# EAGLE board PIC_backpack (EAGLE 8.2.1)
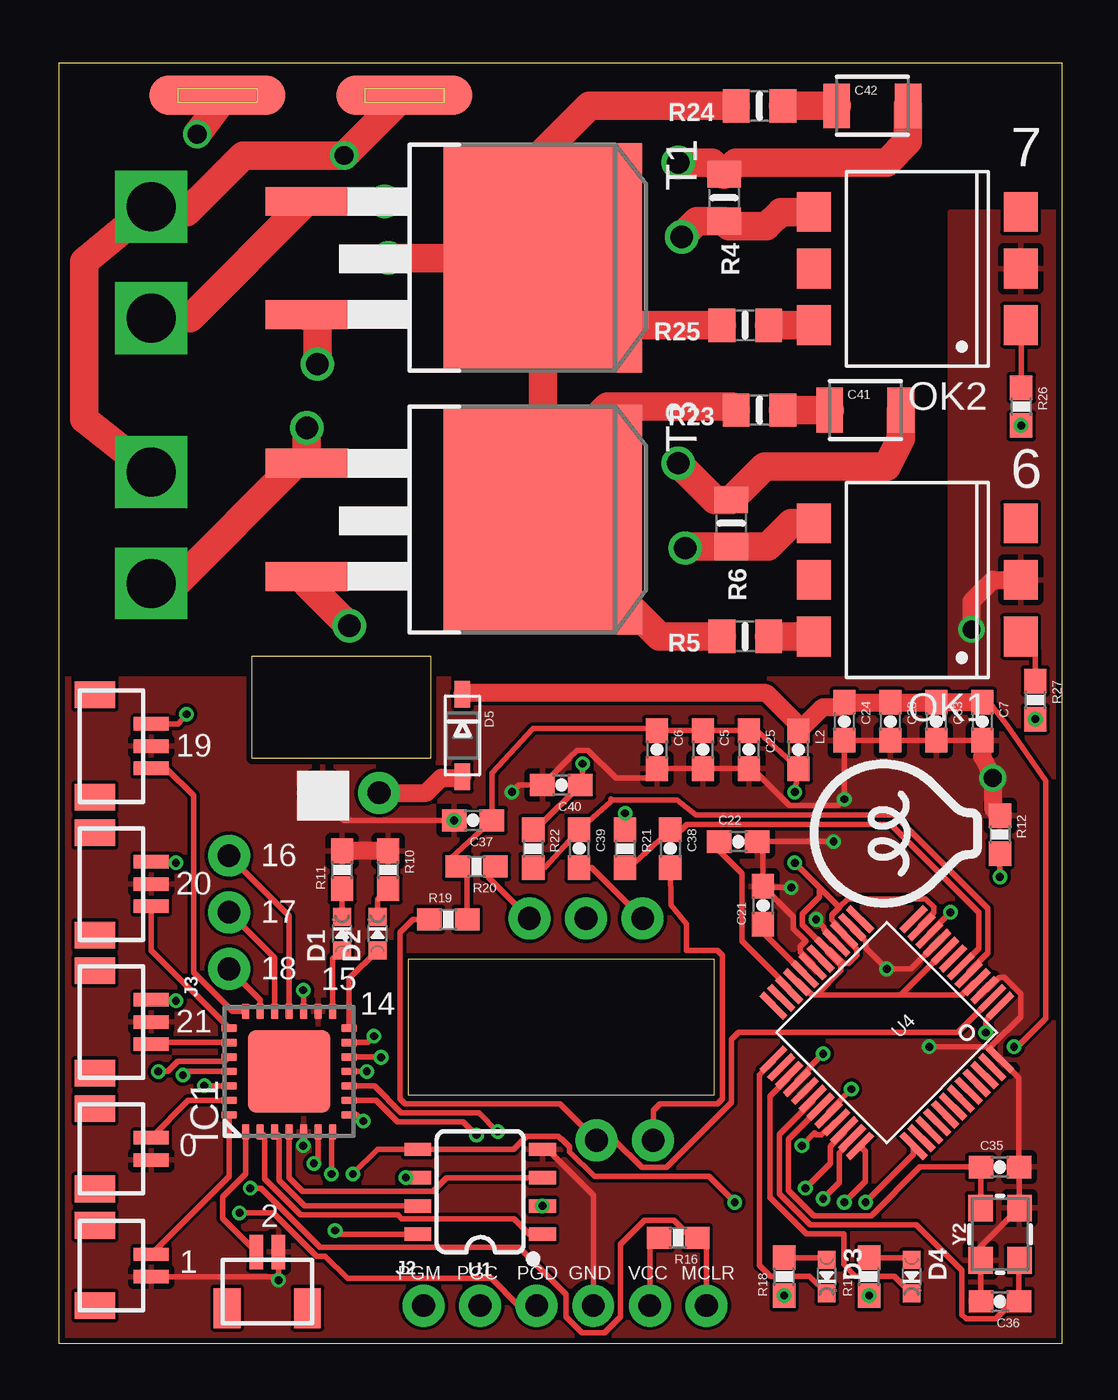
[diagram p0: board, top side]
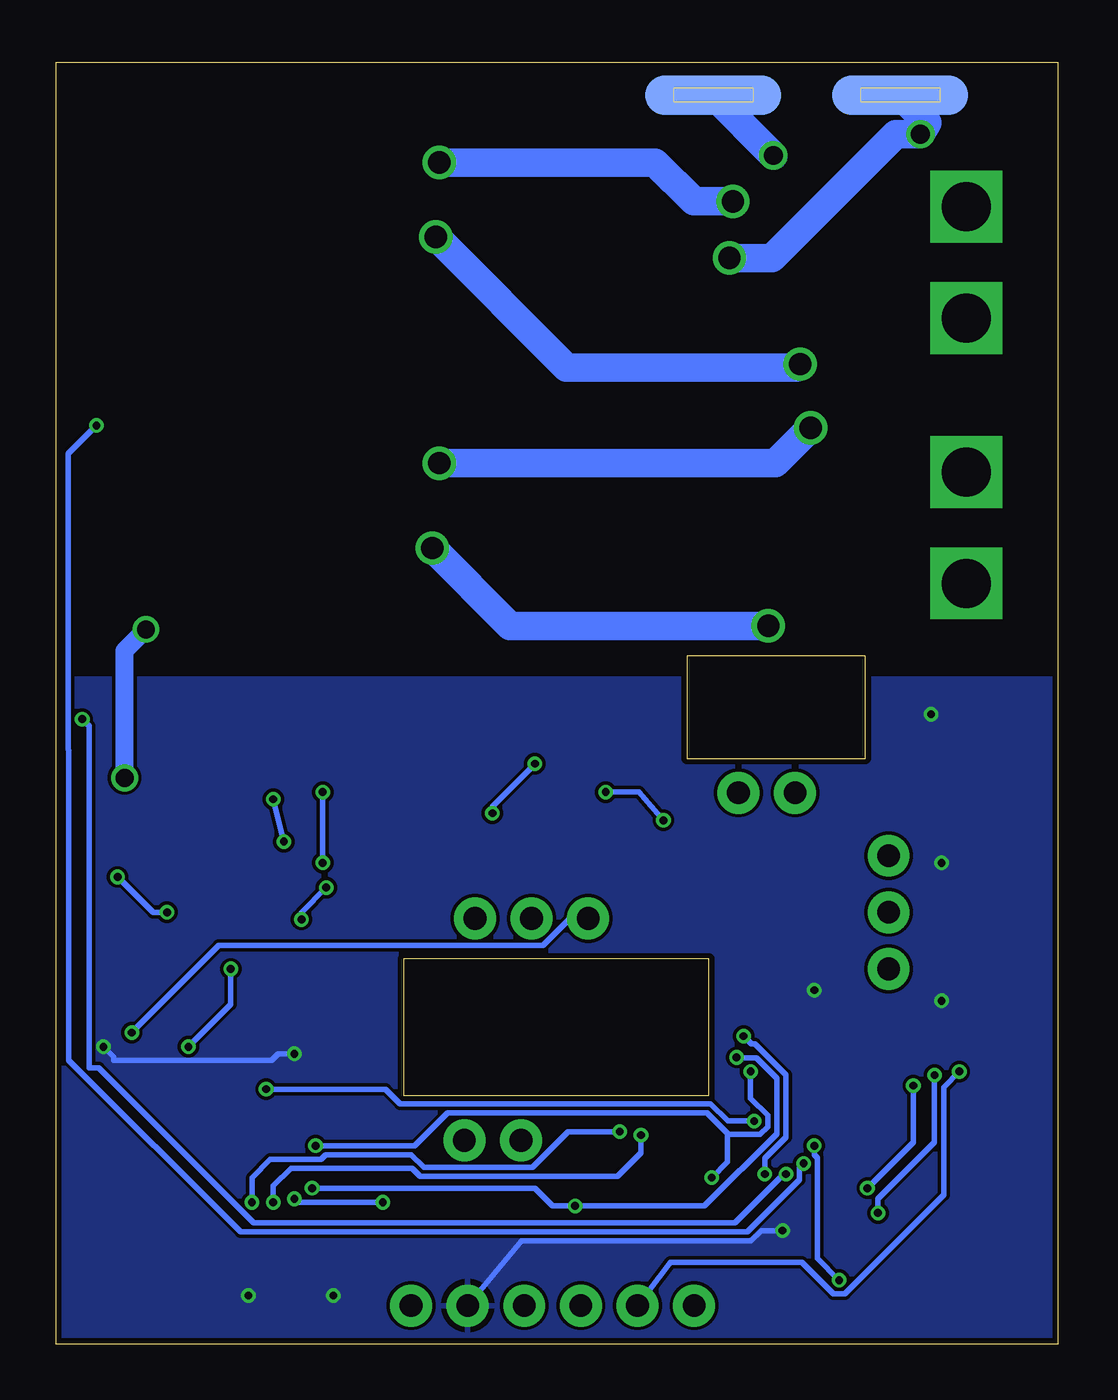
[diagram p1: board, bottom side, seen from below]

Size 45 x 57.5 mm. Coordinates in mm from the lower left corner, seen from the top.
Copper layers (1*16): Top 0.035mm / dielectric 1.5mm / Bottom 0.035mm
Design rules "SeeedStudio_2layer_DRU_no_angle_20140221": minimum track width 6mil, minimum drill 12mil, track to track 6mil, track to pad 6mil, pad to pad 6mil, via to via 6mil, smd to smd 0mil, copper to edge 10mil, drill to drill 10mil, minimum pad ring 10mil, minimum via ring 6mil, stop-mask expansion 2mil, vias tented up to drill 100mil, thermal gap 10mil

## Footprints (pad centres in the part's own frame; a part is rotated, then mirrored left to right if it is on the bottom)
0603-CAP = smd 1.1 x 1: 1 -0.85,0; 2 0.85,0
1210 = smd 1.2 x 2: 1 -1.6,0; 2 1.6,0
CHIPLED_0603_NOOUTLINE = smd 0.8 x 0.8: A 0,-0.75; C 0,0.75
SOD-123 = smd 1.2 x 0.7: A 1.85,0; C -1.85,0
QFN28-ML_6X6MM = smd 0.7 x 0.35: 1 -2.7,1.95; 2 -2.7,1.3; 3 -2.7,0.65; 4 -2.7,0; 5 -2.7,-0.65; 6 -2.7,-1.3; 7 -2.7,-1.95; 15 2.7,-1.95; 16 2.7,-1.3; 17 2.7,-0.65; 18 2.7,0; 19 2.7,0.65; 20 2.7,1.3; 21 2.7,1.95 | smd 0.35 x 0.7: 8 -1.95,-2.7; 9 -1.3,-2.7; 10 -0.65,-2.7; 11 0,-2.7; 12 0.65,-2.7; 13 1.3,-2.7; 14 1.95,-2.7; 22 1.95,2.7; 23 1.3,2.7; 24 0.65,2.7; 25 0,2.7; 26 -0.65,2.7; 27 -1.3,2.7; 28 -1.95,2.7 | smd 3.7 x 3.7: EXP 0,0
1X06_NO_SILK = drill 1.016 pad 1.88: 1 0,0; 2 2.54,0; 3 5.08,0; 4 7.62,0; 5 10.16,0; 6 12.7,0
1X03_NO_SILK = drill 1.016 pad 1.88: 1 0,0; 2 2.54,0; 3 5.08,0
0603 = smd 1.1 x 1: 1 -0.85,0; 2 0.85,0
DIL6-SMD = smd 1.78 x 1.52: 1 -2.54,-4.645; 2 0,-4.645; 3 2.54,-4.645; 4 2.54,4.645; 5 0,4.645; 6 -2.54,4.645
0805_10MGAP = smd 1.2 x 1.5: 1 -1.05,0; 2 1.05,0
0603-RES = smd 1.1 x 1: 1 -0.85,0; 2 0.85,0
D2PAK-3 = smd 1.3 x 3.7: A1 0,0; G 5.08,0 | smd 10.3 x 8.9: A2 2.54,10.6
SO08 = smd 0.6 x 1.2: 1 -1.905,-2.8; 2 -0.635,-2.8; 3 0.635,-2.8; 4 1.905,-2.8; 5 1.905,2.8; 6 0.635,2.8; 7 -0.635,2.8; 8 -1.905,2.8
W5500 = smd 1.5 x 0.3: 1 -4.45,2.75; 2 -4.45,2.25; 3 -4.45,1.75; 4 -4.45,1.25; 5 -4.45,0.75; 6 -4.45,0.25; 7 -4.45,-0.25; 8 -4.45,-0.75; 9 -4.45,-1.25; 10 -4.45,-1.75; 11 -4.45,-2.25; 12 -4.45,-2.75; 25 4.45,-2.75; 26 4.45,-2.25; 27 4.45,-1.75; 28 4.45,-1.25; 29 4.45,-0.75; 30 4.45,-0.25; 31 4.45,0.25; 32 4.45,0.75; 33 4.45,1.25; 34 4.45,1.75; 35 4.45,2.25; 36 4.45,2.75 | smd 0.3 x 1.5: 13 -2.75,-4.45; 14 -2.25,-4.45; 15 -1.75,-4.45; 16 -1.25,-4.45; 17 -0.75,-4.45; 18 -0.25,-4.45; 19 0.25,-4.45; 20 0.75,-4.45; 21 1.25,-4.45; 22 1.75,-4.45; 23 2.25,-4.45; 24 2.75,-4.45; 37 2.75,4.45; 38 2.25,4.45; 39 1.75,4.45; 40 1.25,4.45; 41 0.75,4.45; 42 0.25,4.45; 43 -0.25,4.45; 44 -0.75,4.45; 45 -1.25,4.45; 46 -1.75,4.45; 47 -2.25,4.45; 48 -2.75,4.45
BACKPACK_MINIMAL_HOLES = drill 1.016 pad 1.88: 3.3 14.357,24.729; GND 11.817,24.729; P$6 23.644,19.093; RD+ 26.658,9.132; RD- 26.184,19.093; TD+ 24.118,9.132; TD- 21.104,19.093
AC_BLADE = smd 6.096 x 1.778: P$4 0,0 | smd 6.096 x 1.778 bottom: P$5 0,0
AC_TERMINAL = drill 2.2 square: P$1 0,0; P$2 5,0
3P_JST1.0 = smd 0.6 x 1.55: GND 0,0; SIG -1,0; VCC 1,0 | smd 1.2 x 1.8: P$4 2.3,2.525; P$5 -2.3,2.525
2P_JST1.0 = smd 0.6 x 1.55: GND 0,0; SIG 1,0 | smd 1.2 x 1.8: P$4 2.3,2.525; P$5 -1.3,2.525
CRYSTAL-SMD-3.2X2.5MM = smd 1.2 x 1.1: 1 -1.175,-0.875; 2 1.175,-0.875; 3 1.175,0.875; 4 -1.175,0.875

## Placement (x,y rotation side)
C5  0.1uF  [0603-CAP]  28.89,26.67 270 top
C6  0.1uF  [0603-CAP]  26.82,26.67 270 top
C7  0.1uF  [0603-CAP]  41.43,27.94 270 top
C21  4.7uF  [0603-CAP]  31.58,19.68 90 top
C22  0.01uF  [0603-CAP]  30.47,22.54 0 top
C23  0.1uF  [0603-CAP]  37.3,27.94 270 top
C24  10uF  [0603-CAP]  35.24,27.94 270 top
C25  10uF  [0603-CAP]  30.95,26.67 270 top
C33  10uF  [0603-CAP]  39.36,27.94 270 top
C35  8pF  [0603-CAP]  42.22,7.94 0 top
C36  8pF  [0603-CAP]  42.22,1.9 180 top
C37  0.1uF  [0603-CAP]  18.57,23.49 180 top
C38  6.8nF  [0603-CAP]  27.43,22.22 270 top
C39  6.8nF  [0603-CAP]  23.33,22.22 270 top
C40  0.01uF  [0603-CAP]  22.54,25.08 180 top
C41  0.1uF  [1210]  36.18,41.91 0 top
C42  0.1uF  [1210]  36.49,55.56 0 top
D1  BLUE  [CHIPLED_0603_NOOUTLINE]  12.69,18.41 0 top
D2  RED  [CHIPLED_0603_NOOUTLINE]  14.28,18.41 0 top
D3  GREEN  [CHIPLED_0603_NOOUTLINE]  34.44,3.02 180 top
D4  YELLOW  [CHIPLED_0603_NOOUTLINE]  38.25,3.02 180 top
D5  [SOD-123]  18.09,27.3 270 top
IC1  PIC18F2480-I/ML  [QFN28-ML_6X6MM]  10.31,12.22 90 top
J2  [1X06_NO_SILK]  16.34,1.71 0 top
J3  [1X03_NO_SILK]  7.61,16.83 90 top
L2  1uH  [0603]  33.17,26.67 270 top
OK1  MOC3042S  [DIL6-SMD]  38.51,34.29 90 top
OK2  MOC3042S  [DIL6-SMD]  38.51,48.26 90 top
R4  100K  [0805_10MGAP]  29.84,51.43 270 top
R5  178  [0805_10MGAP]  30.79,31.75 180 top
R6  100K  [0805_10MGAP]  30.16,36.83 270 top
R10  330  [0603-RES]  14.76,21.27 270 top
R11  330  [0603-RES]  12.69,21.27 90 top
R12  12.4k  [0603-RES]  42.22,22.86 270 top
R16  4.7k  [0603-RES]  27.77,4.76 180 top
R17  330  [0603-RES]  36.35,3.02 90 top
R18  330  [0603-RES]  32.54,3.02 90 top
R19  51  [0603-RES]  17.46,19.05 0 top
R20  51  [0603-RES]  18.73,21.43 180 top
R21  51  [0603-RES]  25.39,22.22 270 top
R22  51  [0603-RES]  21.27,22.22 270 top
R23  120Ω  [0805_10MGAP]  31.43,41.91 180 top
R24  120Ω  [0805_10MGAP]  31.43,55.56 180 top
R25  178  [0805_10MGAP]  30.79,45.72 180 top
R26  51  [0603-RES]  43.17,42.07 270 top
R27  51  [0603-RES]  43.81,28.89 270 top
T1  BT138  [D2PAK-3]  11.11,51.28 270 top
T3  BT138  [D2PAK-3]  11.11,39.53 270 top
U1  4MB Flash  [SO08]  18.88,6.83 90 top
U4  W5500  [W5500]  37.14,13.97 225 top
U$1  TPLINK_BACKPACKMINIMAL_HOLES  [BACKPACK_MINIMAL_HOLES]  -0.01,0 0 top
U$2  AC_BLADE  [AC_BLADE]  7.1,56.04 0 top
U$3  AC_BLADE  [AC_BLADE]  15.48,56.04 0 top
U$4  AC_TERMINAL  [AC_TERMINAL]  4.12,46.04 90 top
U$5  AC_TERMINAL  [AC_TERMINAL]  4.12,34.13 90 top
U$10  [HEEPLOGOSMALL]  42.22,18.41 90 top
U$11  JST_MINI_MICRO  [3P_JST1.0]  4.12,26.83 90 top
U$12  JST_MINI_MICRO  [3P_JST1.0]  4.12,20.64 90 top
U$13  JST_MINI_MICRO  [3P_JST1.0]  4.12,14.45 90 top
U$14  2P_JST_MINI_MICRO  [2P_JST1.0]  9.84,4.13 180 top
U$16  2P_JST_MINI_MICRO  [2P_JST1.0]  4.12,3.02 90 top
U$17  2P_JST_MINI_MICRO  [2P_JST1.0]  4.12,8.25 90 top
Y2  CRYSTAL-GROUNDEDSMD-3.2X2.5  [CRYSTAL-SMD-3.2X2.5MM]  42.22,4.92 90 top

## Library data of the parts
C5-C7 C21-C25 C33 C35-C40 L2 R10-R12 R16-R22 R26 R27 = SparkFun-Passives
C41 C42 = SparkFun-Capacitors
D1-D4 R4-R6 R23-R25 = microbuilder
D5 = adafruit
IC1 = microchip; MF: MICROCHIP; MPN: PIC18F2480-I/ML; OC_FARNELL: 1556179; OC_NEWARK: 71J7235
J2 = SparkFun-Connectors; PROD_ID: CONN-08437
J3 = SparkFun-Connectors
OK1 OK2 = optocoupler; MF: FAIRCHILD SEMICONDUCTOR; MPN: MOC3042SM; OC_FARNELL: unknown; OC_NEWARK: 34C1339
T1 T3 = triac
U1 = SparkFun-IC-Memory; PROD_ID: IC-12455
U4 = W5500
U$1-U$5 U$10-U$14 U$16 U$17 = Heep
Y2 = SparkFun-Clocks

## Nets
ACTLED: D4.C U4.27
CAPTORES: C41.1 R23.1
CAPTORES2: C42.1 R24.1
GATE: OK1.4 R6.2 T3.G
GATE2: OK2.4 R4.2 T1.G
GND: C5.2 C6.2 C7.2 C21.2 C22.2 C23.2 C24.2 C25.2 C33.2 C35.2 C36.2 C37.2 C40.2 IC1.5 IC1.16 J2.4 OK1.2 OK2.2 R10.1 R11.2 R12.1 U1.4 U4.3 U4.9 U4.14 U4.16 U4.19 U4.29 U4.48 U$1.GND U$11.GND U$12.GND U$13.GND U$14.GND U$16.GND U$17.GND Y2.2 Y2.4
HOT: R5.2 R23.2 R24.2 R25.2 T1.A2 T3.A2 U$2.P$4 U$2.P$5
INT: IC1.9 U4.36
LNKLED: D3.C U4.25
LOAD1: C41.2 R6.1 T3.A1 U$5.P$1
LOAD2: C42.2 R4.1 T1.A1 U$4.P$1
MCLR: IC1.26 J2.6 R16.1
MISO: IC1.12 U1.2 U4.34
MOSI: IC1.13 U1.5 U4.35
N$2: D2.C R10.2
N$3: C21.1 U4.20
N$5: D1.C R11.1
N$8: C22.1 U4.22
N$10: R12.2 U4.10
N$12: D4.A R17.2
N$13: D3.A R18.2
N$15: D5.A U$1.3.3
N$16: C40.1 R21.1 R22.1
N$23: C35.1 U4.31 Y2.3
N$24: C36.1 U4.30 Y2.1
N$26: OK1.1 R27.1
N$29: OK2.1 R26.1
NEUTRAL: U$3.P$4 U$3.P$5 U$4.P$2 U$5.P$2
PGC: IC1.24 J2.2
PGD: IC1.25 J2.3
PGM: J2.1
RA0: IC1.27 U$17.SIG
RA1: IC1.28 U$16.SIG
RA2: IC1.1 U$14.SIG
RA3: IC1.2 U1.1
RA4: IC1.3 U1.7
RA5: IC1.4 U1.3
RA6: IC1.7 R27.2
RA7: IC1.6 R26.2
RB0: IC1.18 J3.3
RB1: IC1.19 J3.2
RB2: IC1.20 J3.1
RB3: IC1.21 U$11.SIG
RB4: IC1.22 U$12.SIG
RB5: IC1.23 U$13.SIG
RC6: D2.A IC1.14
RC7: D1.A IC1.15
RD+: C38.2 U$1.RD+
RD-: C39.2 U$1.RD-
RDN: C39.1 R22.2 U4.5
RDP: C38.1 R21.2 U4.6
RESTOMOC: OK1.6 R5.1
RESTOMOC2: OK2.6 R25.1
RST: IC1.10 U4.37
SCK: IC1.11 U1.6 U4.33
SCSN: IC1.8 U4.32
TDN: R20.1 U4.1 U$1.TD-
TDP: R19.1 U4.2 U$1.TD+
VCC: C7.1 C23.1 C24.1 C33.1 D5.C IC1.17 J2.5 L2.1 R16.2 R17.1 R18.1 U1.8 U4.28 U$11.VCC U$12.VCC U$13.VCC
VCCA: C5.1 C6.1 C25.1 C37.1 L2.2 R19.2 R20.2 U4.4 U4.8 U4.11 U4.15 U4.17 U4.21

## Tracks (layer width: path | path; a pad name or v marks a point on that pad's centre or on a via)
ACTLED
  Top 0.254: D4.C 37.48,3.04 35.73,3.04 35.21,3.56 35.21,4.93 33.54,4.93 31.9,6.56 31.9,11.11 32.7,11.91 32.7,11.97 32.76,12.03 U4.27
CAPTORES
  Top 1.27: R23.1 C41.1
CAPTORES2
  Top 1.27: R24.1 C42.1
GATE  (via drill 1)
  Top 1.27: T3.G 11.11,34.13 v13.01,32.23 | v28.09,35.72 28.15,35.78 R6.2 31.8,35.78 32.85,36.83 OK1.4
  Bottom 1.27: v13.01,32.23 24.6,32.23 v28.09,35.72
GATE2  (via drill 1)
  Top 1.27: OK2.4 32.38,50.8 31.74,50.16 30.06,50.16 R4.2 28.63,50.38 v27.93,49.69 | v11.58,43.97 11.58,45.72 T1.G
  Bottom 1.27: v27.93,49.69 22.06,43.81 11.74,43.81 v11.58,43.97
GND  (via drill 0.35, 0.8)
  Top 0.254: C7.2 C33.2 C23.2 C24.2 v35.24,24.45 34.95,24.16 32.76,24.16 31.1,25.82 C25.2 C5.2 C6.2 26.56,25.4 24.98,25.4 23.74,26.64 23.24,26.64 22.88,26.29 22.88,26.28 C40.2 20.63,25.08 v20.31,24.76 | v34.76,22.54 C22.2 31.58,22.28 C21.2 | 41.84,13.36 41.74,13.26 U4.48 43.07,11.93 C35.2 43.1,7.91 Y2.2 41.35,4.35 Y2.4 41.37,3.72 C36.2 | U4.3 41.62,15.88 42.19,16.44 42.42,16.44 43.15,15.71 43.15,14.67 41.84,13.36 | U$1.GND 11.81,24.45 12.76,23.49 C37.2 | IC1.5 10.96,8.9 v10.95,8.89 | U$14.GND v9.84,2.86 9.68,3.02 U$16.GND | U1.4 21.9,8.73 23.96,6.67 J2.4 | U4.14 35.59,18.67 36.2,18.06 36.2,17.77 v37.14,16.83 38.23,16.83 U4.9 | v39.05,13.33 41.81,13.33 41.84,13.36 | U4.19 33.82,17.04 33.26,17.6 33.26,17.83 33.5,18.08 32.95,18.63 32.95,19.17 C21.2 | U4.16 34.88,18.03 34.32,18.59 34.32,18.7 v33.97,19.05 | v32.85,20.48 31.64,20.48 C21.2
  Top 0.813: 11.9,24.64 U$1.GND | R10.1 R11.2 | C7.2 41.43,26.35 v41.9,25.4 41.9,24.03 R12.1 | v40.95,32.07 40.95,33.34 41.9,34.29 OK1.2
  Bottom 0.254: v34.76,22.54 v35.24,24.45 | v20.31,24.76 18.83,24.76 C37.2 | v10.95,8.89 10.95,8.48 10.82,8.35 10.82,3.84 v9.84,2.86 | v37.14,16.83 37.14,15.24 v39.05,13.33 | v33.97,19.05 33.97,19.37 v32.85,20.48
  Bottom 0.813: v41.9,25.4 41.9,31.11 v40.95,32.07
  other vias: 17.72,23.49
  pour Top: -2.86,29.84 -2.86,-1.59 48.89,-1.59 48.89,50.8 40,50.8 40,29.84
HOT  (via drill 0.85, 1)
  Top 1.27: U$2.P$5 7.1,55.52 v6.18,54.29 | R5.2 26.94,31.75 T3.A2 | T3.A2 21.71,39.17 24.6,42.07 30.22,42.07 R23.2 | T3.A2 T1.A2 | R25.2 24.72,45.72 T1.A2 | R24.2 23.81,55.56 21.74,53.5 21.74,48.77 T1.A2 | T1.A2 v14.76,48.74
  Bottom 1.27: U$2.P$5 5.87,54.81 v6.18,54.29 7.3,54.29 12.85,48.74 v14.76,48.74
INT  (via drill 0.35)
  Top 0.254: v35.24,6.35 36.19,7.3 36.19,8.63 U4.36 | IC1.9 14.22,10.92 15.18,9.96 18.13,9.96 v18.73,9.37
  Bottom 0.254: v18.73,9.37 18.73,8.57 19.79,7.51 28.64,7.51 29.01,7.88 34.44,7.88 35.24,7.08 v35.24,6.35
LNKLED
  Top 0.254: D3.C 33.67,3.04 31.92,3.04 31.43,3.53 31.43,12.06 32.05,12.69 U4.25
LOAD1  (via drill 1)
  Top 1.27: C41.2 37.78,40.64 37.14,39.37 31.65,39.37 R6.1 29.42,37.88 v27.77,39.53 | U$5.P$1 5.23,34.13 10.63,39.53 T3.A1 v11.11,41.12
  Bottom 1.27: v27.77,39.53 12.69,39.53 v11.11,41.12
LOAD2  (via drill 1)
  Top 1.27: C42.2 38.09,53.97 37.14,53.02 30.38,53.02 R4.1 29.3,53.02 v27.77,53.02 | v14.6,51.28 T1.A1 5.87,46.04 U$4.P$1
  Bottom 1.27: v14.6,51.28 16.34,51.28 18.09,53.02 v27.77,53.02
MCLR  (via drill 0.35)
  Top 0.254: J2.6 29.04,4.34 R16.1 28.37,4.76 27.59,5.54 26.26,5.54 25.18,4.47 25.18,1.21 24.47,0.49 23.46,0.49 22.75,1.21 22.75,2.22 20.62,4.34 11.71,4.34 9.06,6.98 v8.57,6.98 | IC1.26 6.52,11.57 v6.5,11.59
  Bottom 0.254: v6.5,11.59 6.5,9.05 v8.57,6.98
MISO  (via drill 0.35)
  Top 0.254: U4.34 35.23,9.49 34.62,8.87 34.62,8.11 v33.49,6.98 | IC1.12 14.42,12.87 v14.44,12.86
  Bottom 0.254: v14.44,12.86 14.41,12.83 13.55,12.83 12.63,11.91 12.63,9.43 15.87,6.19 U1.2 22.69,6.19 23.49,6.98 v33.49,6.98
  other vias: 21.68,6.19
MOSI  (via drill 0.35)
  Top 0.254: U4.35 35.24,8.89 35.24,8.78 35.02,8.57 35.02,7.25 v34.28,6.51 | IC1.13 13.83,13.52 v14.12,13.81 | v13.17,7.62 14.28,8.73 15.23,8.73 U1.5 20.39,8.73 20.97,9.31 22.4,9.31 22.5,9.21 22.54,9.21 22.89,8.85 22.89,8.63 24.01,7.51 29.16,7.51 v30.31,6.35
  Bottom 0.254: v13.17,7.62 13.17,8.31 12.23,9.26 12.23,12.08 13.61,13.47 13.78,13.47 v14.12,13.81 | v30.31,6.35 34.28,6.35 v34.28,6.51
N$2
  Top 0.254: D2.C 14.28,19.95 R10.2
N$3
  Top 0.254: C21.1 31.43,18.62 U4.20
N$5
  Top 0.254: D1.C R11.1
N$8
  Top 0.254: U4.22 32.76,15.98 30.65,18.09 30.65,18.24 30.63,18.73 30.63,21.11 29.62,22.12 C22.1
N$10  (via drill 0.35)
  Top 0.254: U4.10 39.05,18.42 v40,19.37 | v42.22,20.95 R12.2
  Bottom 0.254: v40,19.37 40.63,19.37 v42.22,20.95
N$12
  Top 0.254: R17.2 38.15,3.87 D4.A
N$13
  Top 0.254: R18.2 34.34,3.87 D3.A
N$15
  Top 0.813: U$1.3.3 16.47,24.73 17.14,25.4 18.04,25.4 D5.A
N$16  (via drill 0.35)
  Top 0.254: R22.1 21.58,23.28 C40.1 23.49,25.18 v23.49,26.03 | R21.1 v25.39,23.81
  Bottom 0.254: v25.39,23.81 25.39,24.13 v23.49,26.03
N$23
  Top 0.254: Y2.3 41.37,6.12 C35.1 38.63,7.94 36.44,5.74 33.87,5.74 32.72,6.89 32.72,9.17 34.19,10.63 U4.31
N$24
  Top 0.254: Y2.1 43.07,3.72 C36.1 42.82,1.9 42.04,1.13 40.71,1.13 40.52,1.31 40.52,3.29 38.47,5.34 33.71,5.34 32.32,6.72 32.32,9.4 33.82,10.9 U4.30
N$26
  Top 0.254: R27.1 43.81,31.09 OK1.1
N$29
  Top 0.254: 42.86,45.42 OK2.1 43.17,45.7 R26.1
NEUTRAL  (via drill 0.85)
  Top 1.27: U$5.P$2 1.1,41.51 1.1,48.58 3.72,50.72 U$4.P$2 4.52,50.8 5.71,50.8 8.25,53.34 v12.78,53.34 U$3.P$5
  Bottom 1.27: U$3.P$5 v12.78,53.34
PGC  (via drill 0.35)
  Top 0.254: IC1.24 7.42,12.68 5.3,12.68 4.85,12.22 v4.44,12.22
  Bottom 0.254: v4.44,12.22 5.14,11.52 5.14,6.69 9.58,2.25 10.09,2.25 11.51,3.67 17.41,3.67 J2.2
PGD  (via drill 0.35)
  Top 0.254: IC1.25 5.71,12.22 v5.55,12.06 | v8.09,5.87 9.6,5.87 11.54,3.93 11.93,3.93 12.93,2.93 19.39,2.93 20.61,1.71 J2.3
  Bottom 0.254: v8.09,5.87 8.09,6.51 5.55,9.05 v5.55,12.06
RA0
  Top 0.254: U$17.SIG 5.79,10.92 IC1.27
RA1
  Top 0.254: U$16.SIG 7.61,7.51 IC1.28
RA2
  Top 0.254: IC1.1 8.36,7.64 7.32,6.6 7.32,5.64 U$14.SIG
RA3
  Top 0.254: IC1.2 9.21,9.33 9.21,7.42 10.84,5.78 15.2,5.78 15.37,5.61 20.42,5.61 21.11,4.92 U1.1
RA4
  Top 0.254: IC1.3 9.86,9.33 9.86,7.34 11.01,6.19 U1.7
RA5
  Top 0.254: IC1.4 10.31,7.46 10.92,6.85 16.77,6.85 17.38,7.46 U1.3
RA6  (via drill 0.35)
  Top 0.254: v12.22,7.62 12.22,9.48 IC1.7
  Bottom 0.254: R27.2 43.49,27.72 43.49,12.38 43.08,12.38 36.12,5.43 14.51,5.43 12.31,7.62 v12.22,7.62
  other vias: 43.81,28.04
RA7  (via drill 0.35)
  Top 0.254: IC1.6 11.61,8.28 v11.42,8.1
  Bottom 0.254: v11.42,8.1 11.61,7.91 11.61,7.37 13.96,5.02 36.7,5.02 44.42,12.73 44.42,26.64 44.44,26.67 44.44,39.95 R26.2
  other vias: 43.17,41.22
RB0
  Top 0.254: IC1.18 10.31,19.21 J3.3
RB1
  Top 0.254: IC1.19 9.66,17.32 J3.2
RB2
  Top 0.254: IC1.20 9.01,15.43 J3.1
RB3
  Top 0.254: U$11.SIG 4.8,25.83 6.03,24.61 6.03,16.67 7.77,14.92 IC1.21
RB4
  Top 0.254: IC1.22 4.12,17.66 U$12.SIG
RB5
  Top 0.254: U$13.SIG 4.2,13.52 IC1.23
RC6
  Top 0.254: IC1.14 13.01,16.4 D2.A
RC7
  Top 0.254: IC1.15 12.26,17.3 D1.A
RD+
  Top 0.254: C38.2 27.46,19.7 28.14,18.86 28.14,17.65 29.53,17.65 29.75,17.43 29.75,11 29.53,10.77 26.96,10.77 26.66,10.48 26.66,9.14 U$1.RD+
RD-
  Top 0.254: C39.2 23.9,21.37 U$1.RD-
RDN
  Top 0.254: R22.2 21.79,21.37 C39.1 24.76,24.34 24.76,24.45 24.79,24.42 27.72,24.42 28.57,23.73 37.48,23.73 41.67,19.54 41.67,17.54 40.82,16.69 U4.5
RDP
  Top 0.254: R21.2 25.6,21.37 C38.1 27.93,23.07 28.17,23.32 37.31,23.32 41.27,19.37 41.27,17.74 U4.6
RESTOMOC
  Top 1.27: R5.1 OK1.6
RESTOMOC2
  Top 1.27: R25.1 OK2.6
RST  (via drill 0.35)
  Top 0.254: U4.37 38.34,8.5 v36.19,6.35 | v19.68,9.52 18.84,10.37 15.35,10.37 14.14,11.57 IC1.10
  Bottom 0.254: v36.19,6.35 36.19,7.46 35.37,8.28 33.08,8.28 32.88,8.48 29.04,8.48 28.47,7.91 23.61,7.91 22,9.52 v19.68,9.52
SCK  (via drill 0.35)
  Top 0.254: U4.33 34.78,9.94 34.22,9.38 33.98,9.38 33.9,9.46 v33.33,8.89 | v13.8,12.22 IC1.11 | v15.55,7.46 U1.6
  Bottom 0.254: v33.33,8.89 28.89,8.89 27.41,10.37 15.77,10.37 14.84,9.44 | v13.8,12.22 13.8,11.02 13.04,10.25 13.04,9.75 13.39,9.39 14.8,9.39 14.84,9.44 | 14.84,9.44 14.84,8.17 v15.55,7.46
SCSN  (via drill 0.35)
  Top 0.254: U4.32 34.52,10.39 35.09,10.95 35.09,10.96 v35.55,11.43 | IC1.8 13.37,10.27 v13.65,10
  Bottom 0.254: v35.55,11.43 30.19,11.43 29.53,10.77 15.6,10.77 14.83,10 v13.65,10
TDN  (via drill 0.35)
  Top 0.254: R20.1 19.26,20.93 U$1.TD- | v41.59,13.97 41.59,14.53 U4.1
  Bottom 0.254: U$1.TD- 21.91,19.09 23.13,17.87 37.68,17.87 v41.59,13.97
TDP
  Top 0.254: U4.2 40.32,13.97 30.47,13.97 30.16,13.66 30.16,10.83 27.25,7.91 26.15,7.91 24.93,9.13 U$1.TD+ 22.47,10.77 15.52,10.77 15.29,11 15.29,18.47 15.87,19.05 R19.1
VCC  (via drill 0.35)
  Top 0.254: v42.86,13.33 43,13.33 44.27,14.6 44.27,25.26 42.54,27.78 41.9,28.57 41.59,28.89 41.05,28.89 C7.1 | U4.28 33.11,11.81 33.67,12.37 33.67,12.41 v34.28,13.02 | J2.5 26.5,4.34 R16.2 | U$13.VCC 5.18,15.45 v5.23,15.4 | U$12.VCC 5.18,21.64 v5.23,21.59 | U$11.VCC 5.34,27.83 v5.71,28.26 | IC1.17 10.96,15.86 v10.95,15.87 | 15.55,4.92 U1.8 12.38,4.92 v12.38,5.08
  Top 0.813: C7.1 C33.1 C23.1 C24.1 35.02,28.57 34.28,28.57 33.23,27.52 L2.1 33.01,27.94 31.74,29.21 18.15,29.21 D5.C
  Bottom 0.254: v34.28,13.02 35.01,13.02 35.3,12.73 42.39,12.73 42.39,12.87 v42.86,13.33 | v12.38,5.08 13.32,5.08 13.79,4.61 24.08,4.61 J2.5
  other vias: 32.54,2.17 36.35,2.17
  pour Bottom: -2.86,29.84 -2.86,-1.59 50.16,-1.59 50.16,29.84
VCCA  (via drill 0.35)
  Top 0.254: 33.77,15.67 33.16,16.28 U4.21 33.21,16.23 33.77,15.67 | U4.17 34.47,17.6 35.09,16.98 35.09,16.75 34,15.67 | U4.17 34.57,17.7 35.19,17.08 35.42,17.08 35.79,17.46 35.79,17.69 35.18,18.3 U4.15 35.23,18.45 34.67,19.02 34.67,19.25 35.01,19.59 | 35.01,19.59 34.12,20.48 | 34.12,20.48 v33.01,21.59 | v33.01,24.76 L2.2 31.31,27.52 C25.1 C5.1 C6.1 26.88,27.62 21.27,27.62 19.42,25.61 C37.1 17.56,21.79 R20.2 18.31,21 R19.2 | 33.77,15.67 34,15.67 | U4.4 41.07,16.23 40.51,15.67 37.78,15.67 | 37.78,15.67 34,15.67 | 34.12,20.48 34.12,20.07 33.36,19.3 33.36,18.8 34.01,18.15 34.02,18.15 U4.17 | 35.02,19.6 35.4,19.98 38.88,19.98 39.26,19.6 39.26,19.37 38.65,18.76 U4.11 | 35.02,19.6 | 35.02,19.6 35.01,19.59 | U4.8 37.78,15.67
  Bottom 0.254: v33.01,21.59 v33.01,24.76

## Text on the board
tPlace: 7 | 6 | 19 | 16 | 20 | 17 | 18 | 15 | 14 | 21 | 0 | 2 | 1 | PGM | PGC | PGD | GND | VCC | MCLR